# Altium PCB MYBOARD.PcbDoc (part 1 of 2)
Units mil, origin at the board's own origin, x right, y up, seen from the top; angles counter-clockwise.
Board outline 4724.41 x 3940 mil, 2 copper layers (Top Layer, Bottom Layer); 166 components, 173 nets, 742 pads, 144 vias.
Unrouted connection lines stored in the file: 194.
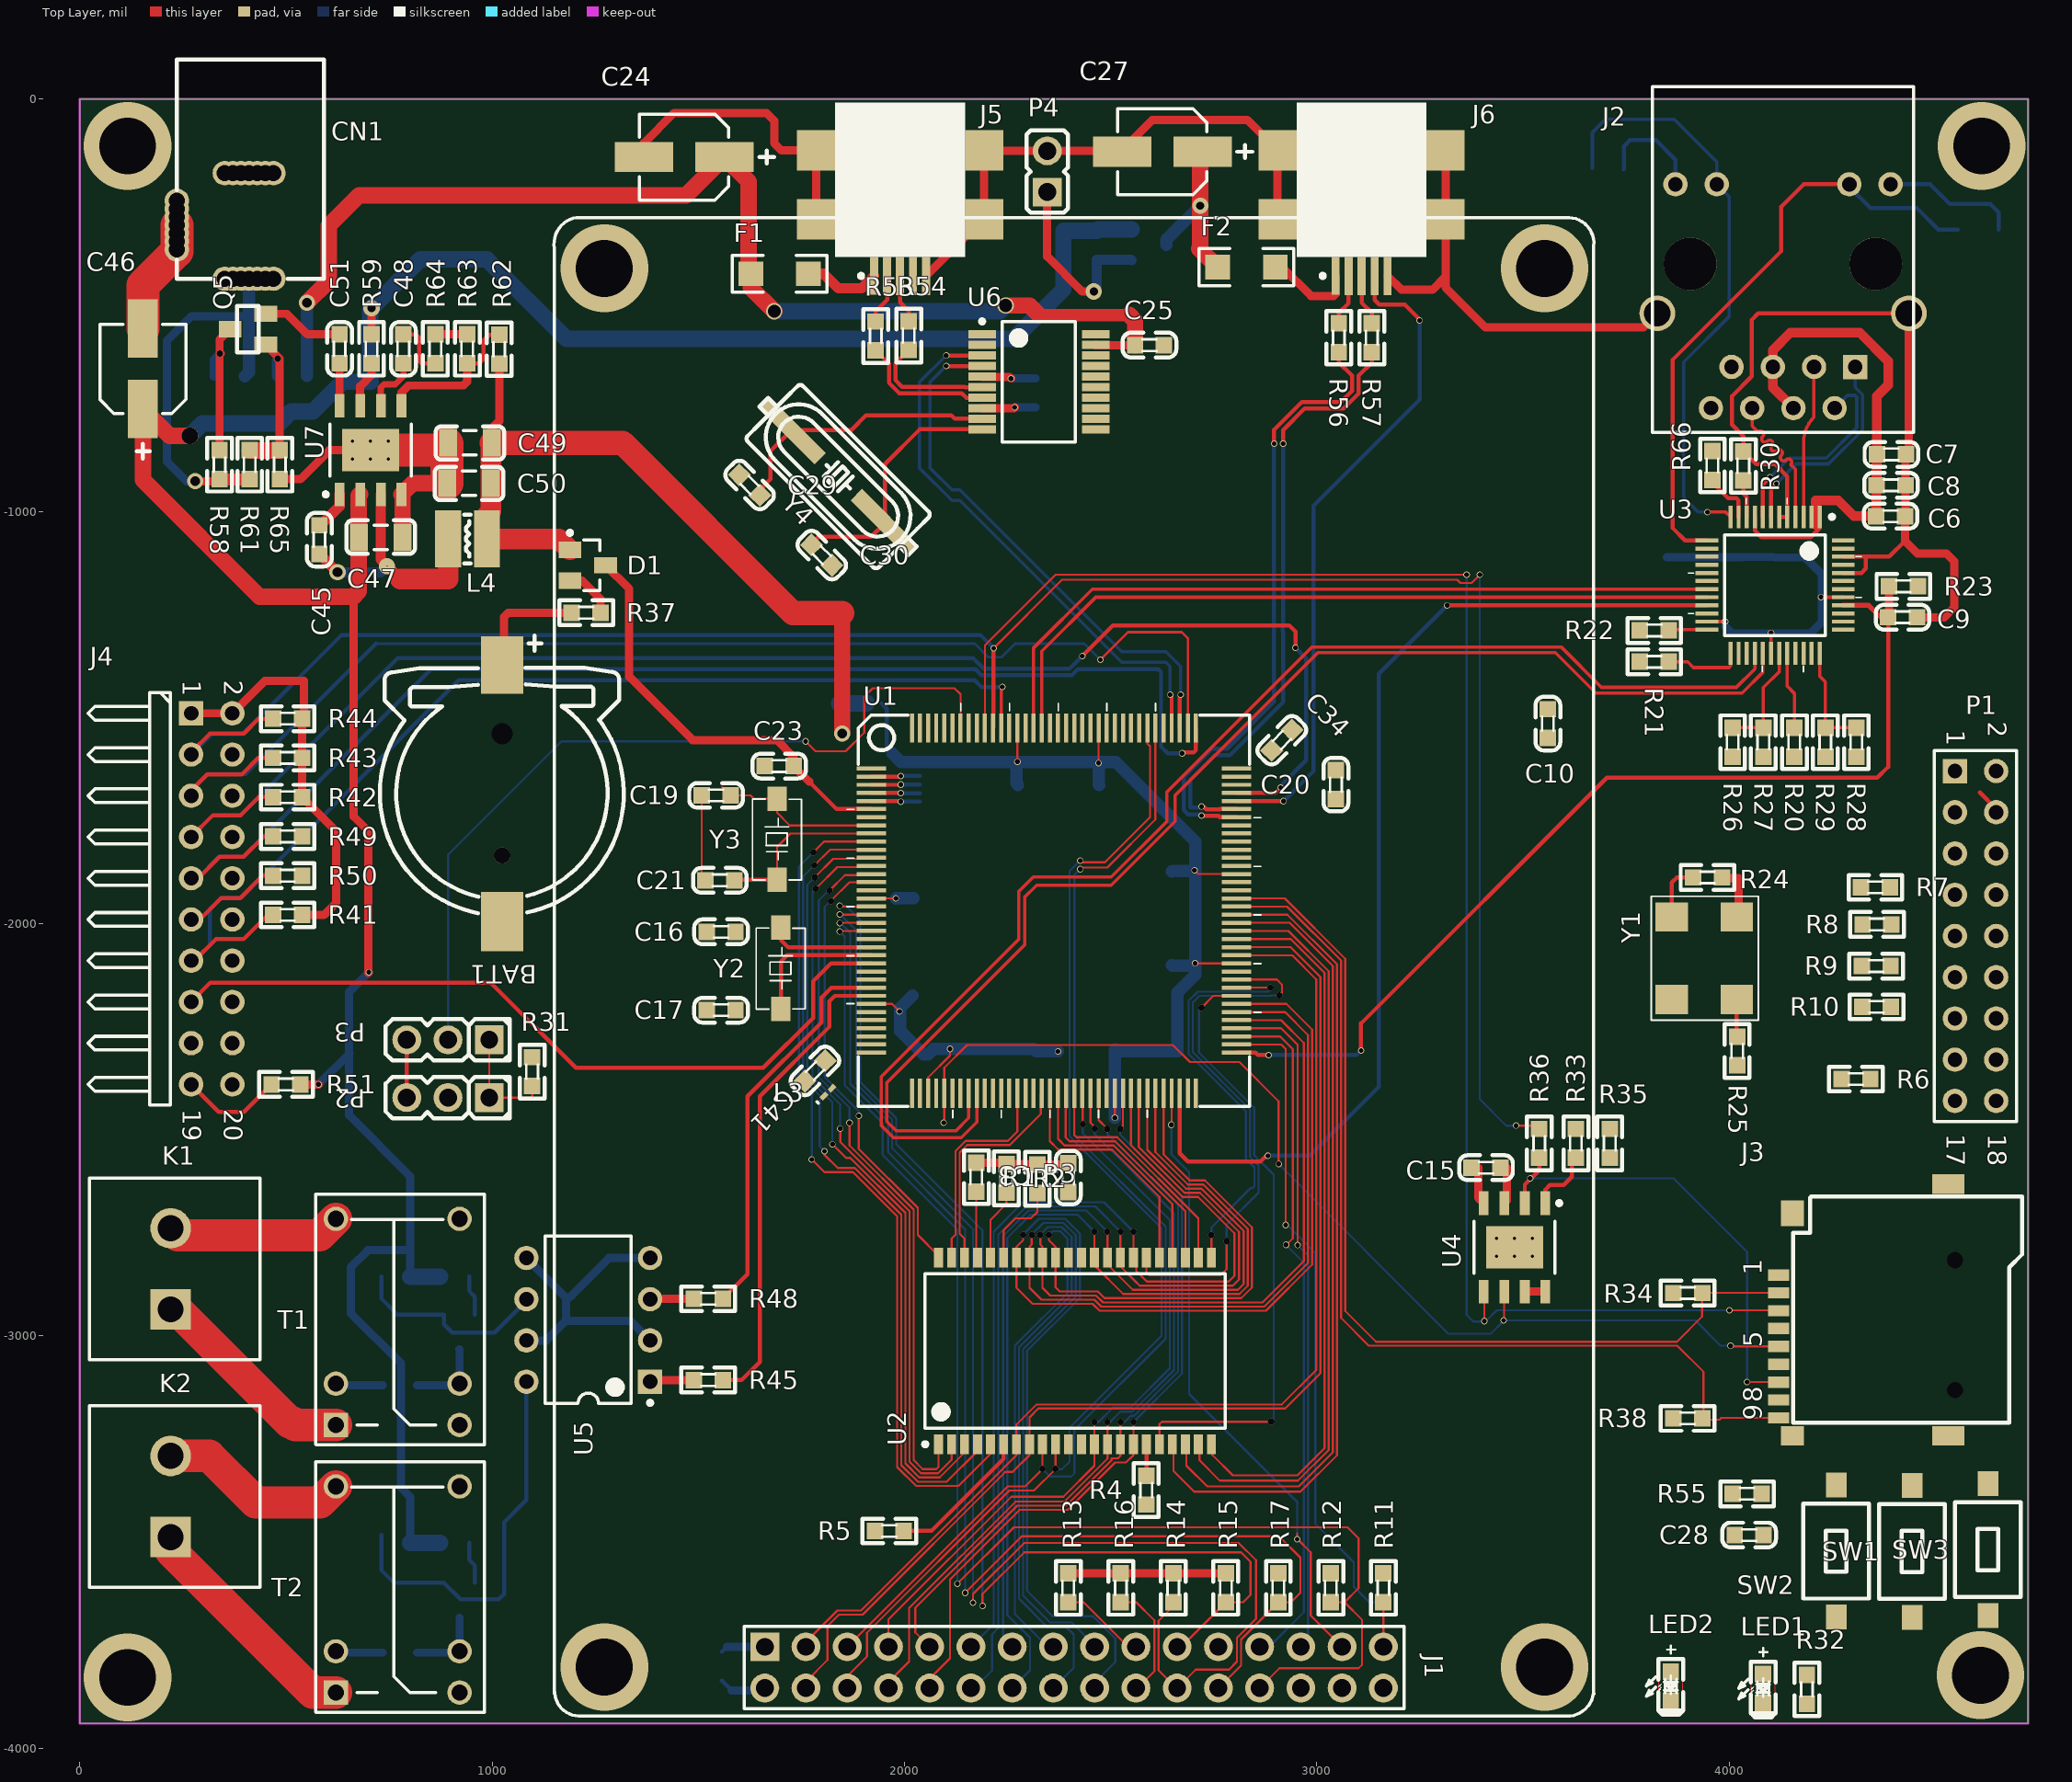
[diagram p0: Top Layer view]
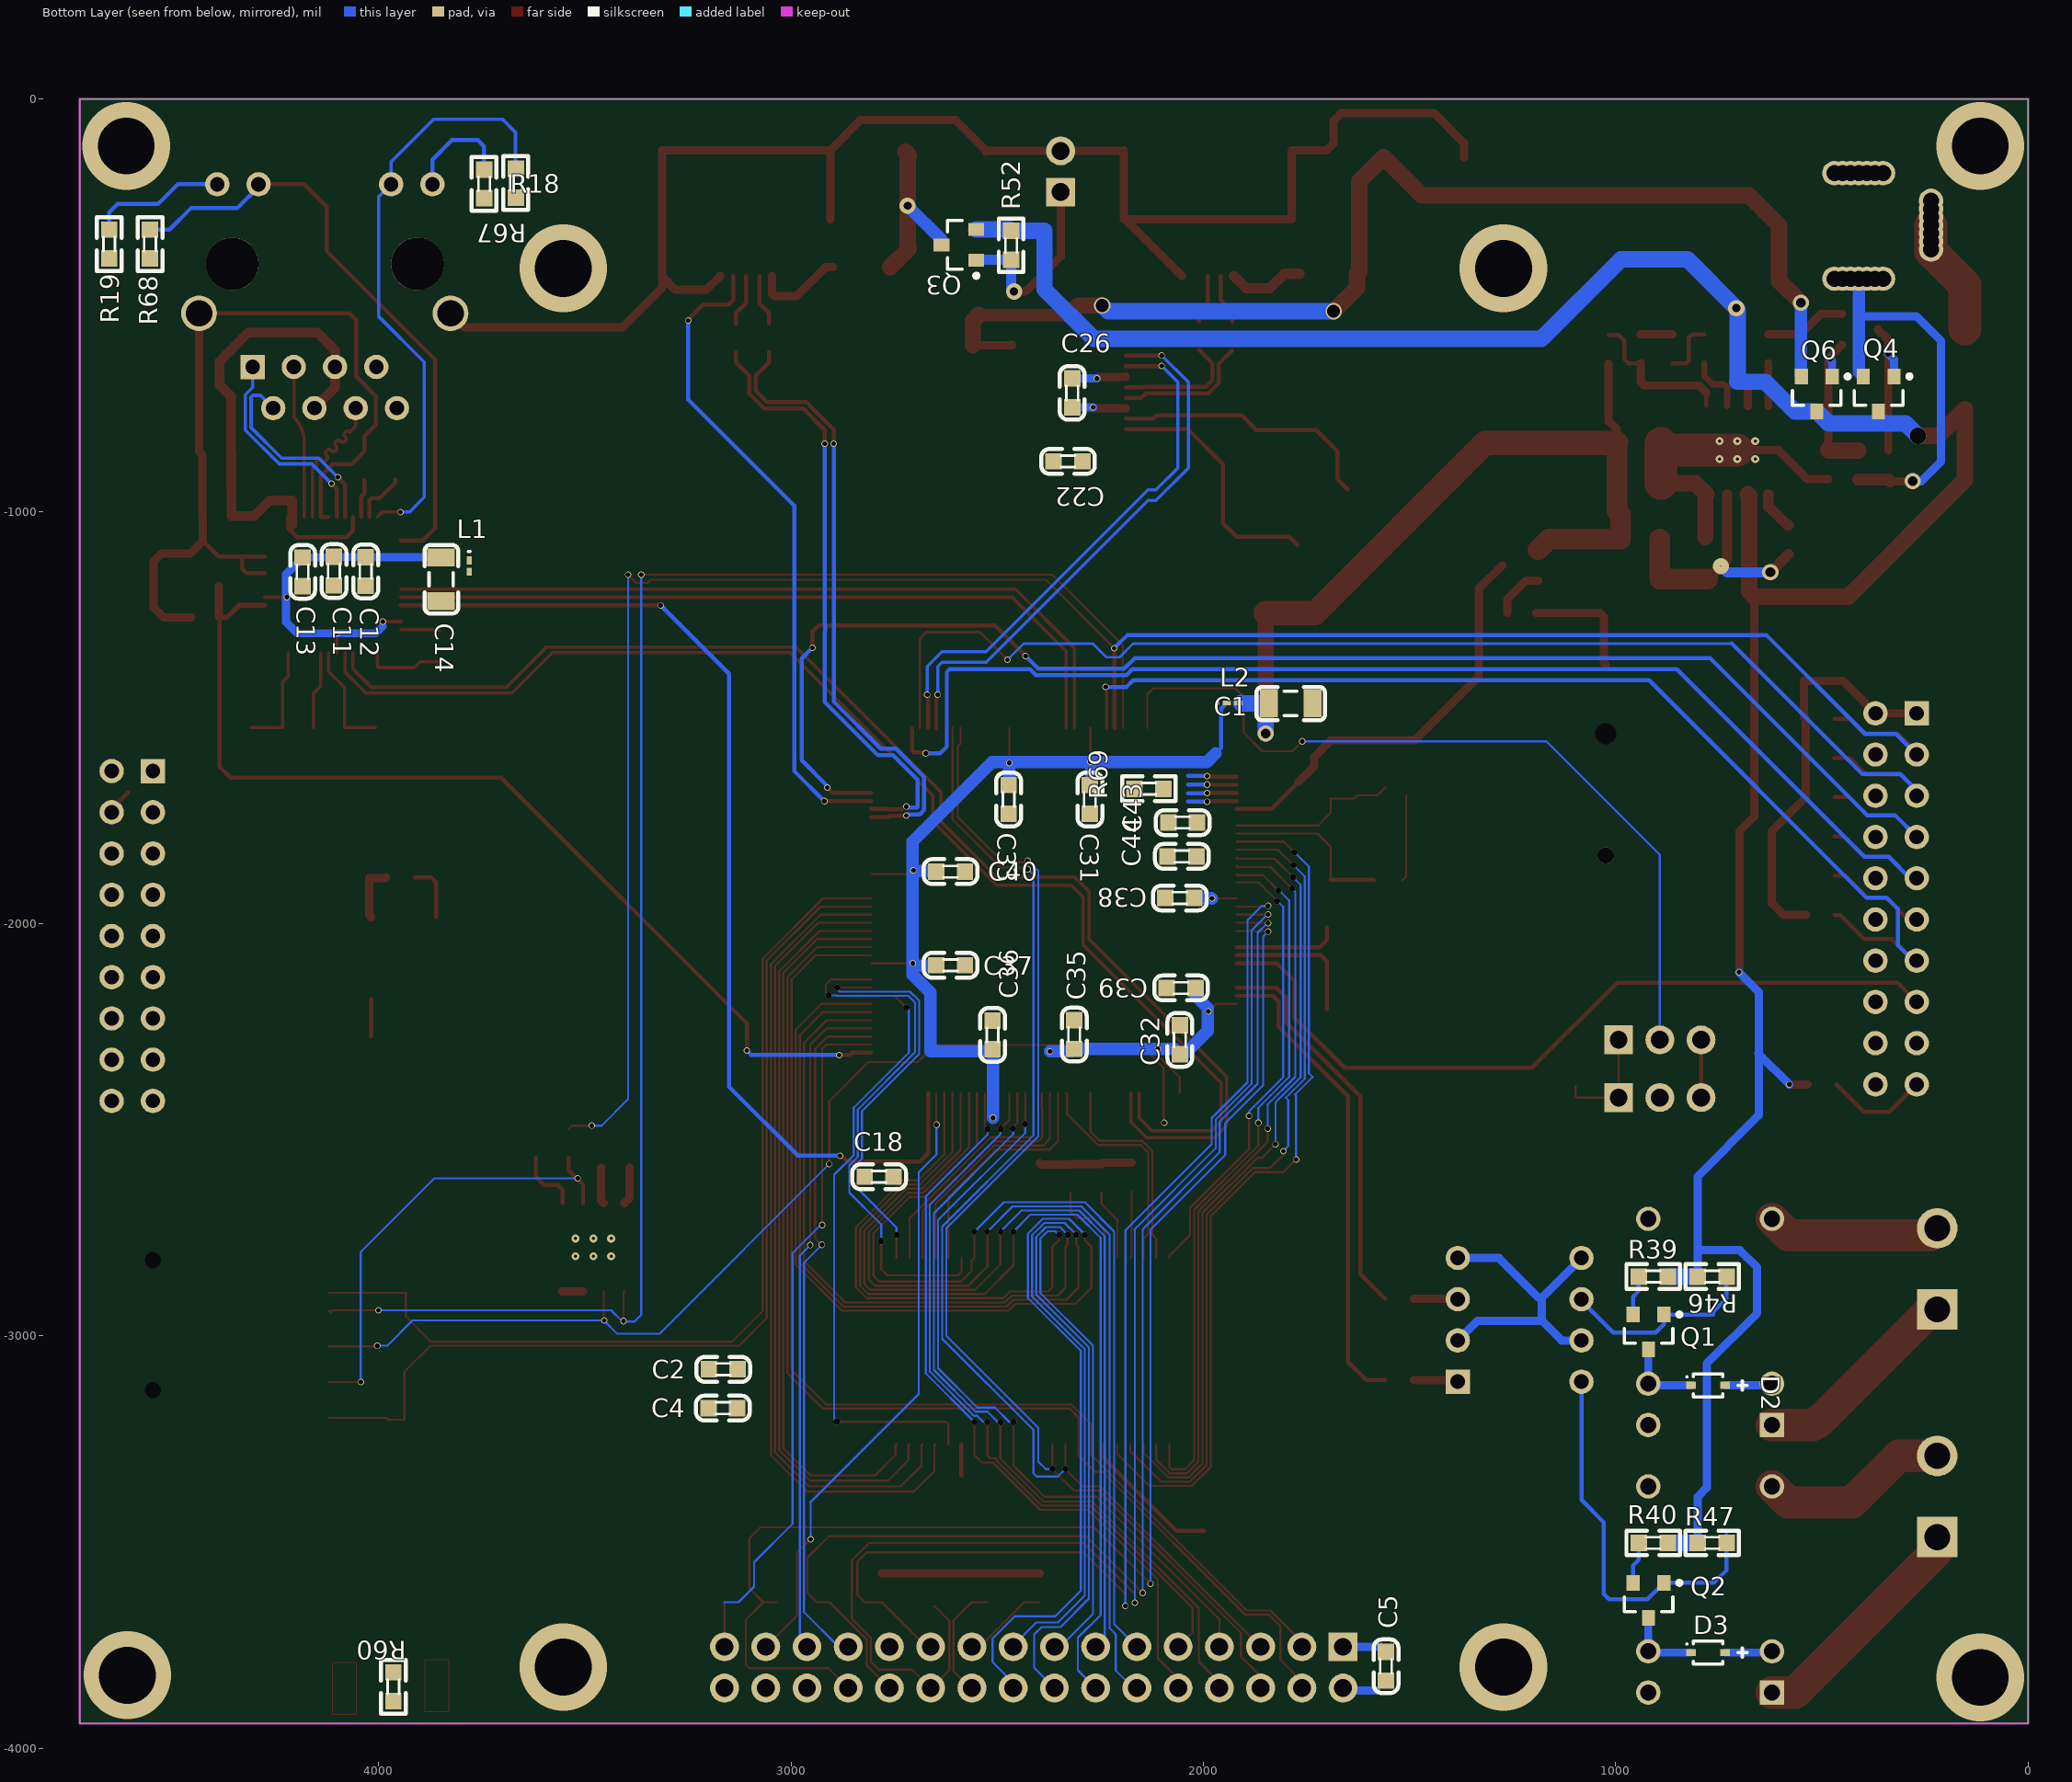
[diagram p1: Bottom Layer view, seen from below]

## Layer stack, top to bottom
Top Solder: solder mask 0.4, Solder Resist, Dk 3.5
Top Layer: signal copper 1.4
Dielectric 1: dielectric 12.6, FR-4, Dk 4.8
Bottom Layer: signal copper 1.4
Bottom Solder: solder mask 0.4, Solder Resist, Dk 3.5

## Board outline
0,-3940 0,0 4724.41,0 4724.41,-3940

## Design rules (kind name [scope] priority, off if disabled: settings)
Clearance [All] p1: gap=5 ignorepadtopadclearanceinfootprint=FALSE
DiffPairsRouting [All] p1: maxlimit=10 minlimit=10 mostfreqgap=6 toplayer_minwidth=6 toplayer_maxwidth=10 toplayer_prefwidth=6 bottomlayer_minwidth=6 bottomlayer_maxwidth=10 bottomlayer_prefwidth=6 maxuncoupledlength=500
PolygonConnect [All] p1: connectstyle=Relief reliefconductorwidth=10 reliefentries=4 polygonreliefangle="90 Angle" airgapwidth=10
RoutingVias [InDrillLayerPair('Top Layer - Bottom Layer')] p1: holewidth=11.81 width=15.75 viastyle="Through Hole" minholewidth=11.81 minwidth=15.75 maxholewidth=39.37 maxwidth=59.06
SolderMaskExpansion [All] p1: expansion=4
Width [All] p1: maxlimit=80 minlimit=5 preferedwidth=5
29 further rules are at their usual default settings.

## Classes and differential pairs
component class MYBOARD_03-CORE&SRAM: C1 C2 C3 C4 C5 C6 C7 C8 C9 C10 C11 C12 C13 C14 J1 J2 L1 P1 R1 R2 R3 R4 R5 R6 R7 R8 R9 R10 R11 R12 R13 R14 R15 R16 R17 R18 R19 R20 R21 R22 R23 R24 R25 R26 R27 R28 R29 R30 R66 R67 R68 U2 U3 Y1
component class "MYBOARD_04-Other Function": BAT1 C15 C16 C17 C18 C19 C20 C21 C22 C23 C24 C25 C26 C27 C28 C29 C30 D1 D2 D3 F1 F2 J3 J4 J5 J6 K1 K2 LED1 P2 P3 P4 Q1 Q2 Q3 R31 R32 R33 R34 R35 R36 R37 R38 R39 R40 R41 R42 R43 R44 R45 R46 R47 R48 R49 R50 R51 R52 R53 R54 R55 R56 R57 SW1 SW2 SW3 T1 T2 U1 U4 U5 U6 Y2 Y3 Y4
component class MYBOARD_05-PWR: C31 C32 C33 C34 C35 C36 C37 C38 C39 C40 C41 C43 C44 C45 C46 C47 C48 C49 C50 C51 CN1 L2 L3 L4 LED2 Q4 Q5 Q6 R58 R59 R60 R61 R62 R63 R64 R65 R69 U7
net class DATA[0..15]: DATA0 DATA1 DATA2 DATA3 DATA4 DATA5 DATA6 DATA7 DATA8 DATA9 DATA10 DATA11 DATA12 DATA13 DATA14 DATA15

## Components (designator, comment, footprint, x,y, rotation, side; value= is the part's Value field where it differs from the comment)
BAT1 "BATT" BC501SM 1024,-1995.05 r90 top locked
C1 "22uF" C1206 1788.15,-1466 r0 bottom
C2 "10uF" C0603_DWS 3164,-3081 r0 bottom
C3 "0.1uF" C0603_DWS 2397,-2616 r270 top
C4 "0.1uF" C0603_DWS 3165,-3175 r0 bottom
C5 "10uF" C0603_DWS 1557,-3801 r270 bottom
C6 "0.1uF" C0603_DWS 4391,-1012 r0 top
C7 "0.1uF" C0603_DWS 4393,-862 r0 top
C8 "0.1uF" C0603_DWS 4392,-937 r0 top
C9 "0.1uF" C0603_DWS 4420,-1257 r0 top
C10 "0.1uF" C0603_DWS 3560,-1515 r270 top
C11 "0.1uF" C0603_DWS 4108,-1145 r270 bottom
C12 "0.1uF" C0603_DWS 4031,-1146 r270 bottom
C13 "0.1uF" C0603_DWS 4184,-1147 r270 bottom
C14 "22uF" C1206 3848,-1164.85 r270 bottom
C15 "0.1uF" C0603_DWS 3410,-2592 r180 top
C16 "10pF" C0603_DWS 1555,-2020 r0 top
C17 "10pF" C0603_DWS 1555,-2210 r0 top
C18 "0.1uF" C0603_DWS 2786,-2614 r180 bottom
C19 "10pF" C0603_DWS 1543,-1689 r0 top
C20 "0.1uF" C0603_DWS 3046,-1663 r270 top
C21 "10pF" C0603_DWS 1552,-1895 r0 top
C22 "0.1uF" C0603_DWS 2328,-879 r0 bottom
C23 "1uF" C0603_DWS 1696,-1618 r180 top
C24 "22uF/25V" CAPAE7053X56M 1465.56,-141 r180 top
C25 "10uF" C0603_DWS 2594,-597 r0 top
C26 "0.1uF" C0603_DWS 2318,-713 r270 bottom
C27 "10uF/25" CAPAE7053X56M 2625,-128 r180 top
C28 "0.1uF" C0603_DWS 4048,-3483 r180 top
C29 "10pF" C0603_DWS 1624.25,-936.25 r315 top
C30 "10pF" C0603_DWS 1799.25,-1106.25 r135 top
C31 "0.1uF" C0603_DWS 2275,-1699 r270 bottom
C32 "0.1uF" C0603_DWS 2057,-2282 r90 bottom
C33 "0.1uF" C0603_DWS 2472,-1699 r270 bottom
C34 "0.1uF" C0603_DWS 2914.75,-1555.25 r45 top
C35 "0.1uF" C0603_DWS 2313,-2269 r90 bottom
C36 "0.1uF" C0603_DWS 2511,-2270 r90 bottom
C37 "0.1uF" C0603_DWS 2613,-2101 r180 bottom
C38 "0.1uF" C0603_DWS 2057,-1938 r0 bottom
C39 "10uF" C0603_DWS 2054,-2156 r0 bottom
C40 "10uF" C0603_DWS 2613,-1874 r180 bottom
C41 "0.1uF" C0603_DWS 1782.75,-2357.25 r225 top
C43 "10nF" C0603_DWS 2050,-1755 r0 bottom
C44 "1uF" C0603_DWS 2052,-1837 r0 bottom
C45 "10nF" C0603_DWS 581,-1069 r270 top
C46 "10uF/25" CAPAE7053X56M 153,-654.44 r90 top
C47 "10uF" C1206 729.85,-1063 r0 top
C48 "3.9nF" C0603_DWS 784.8,-606 r90 top
C49 "22uF" C1206 945.85,-834 r180 top
C50 "22uF" C1206 943.85,-932 r180 top
C51 "0.1uF" C0603_DWS 630,-606 r90 top
CN1 "DC005" PWR_JACK_UNI_MILLING 223.62,-435.91 r270 top
D1 "BAT54C" BAT54C 1231.69,-1131 r0 top
D2 "IN4148" 1N4148WS 776,-3120 r180 bottom
D3 "IN4148" 1N4148WS 776,-3768 r180 bottom
F1 "FUS" 1206 1697,-424 r180 top
F2 "FUS" 1206 2829,-408 r180 top
J1 "TFT_LCD" "TFT LCD" 1152,-3924 r90 top locked
J2 "HR911105A" HR911105A 3813.24,30.01 r0 top locked
J3 "TF-01A" TF-01A 4119.58,-3198.69 r90 top
J4 "Header 10X2" HDR2X10H 270,-1490 r270 top locked
J5 "MINI-USB-AB" MINI-B 1989,-277 r90 top
J6 "MINI-USB-AB" MINI-B 3108.26,-277 r90 top
K1 "KF128-2P" KF128-2P 437,-2616.95 r270 top locked
K2 "KF128-2P" KF128-2P 437,-3169 r270 top locked
L1 "Inductor" 0603 3780,-1132.78 r270 bottom value=10mH
L2 "Inductor" 0603 1929.22,-1465 r180 bottom value=10mH
L3 "Inductor" 0603 1814.26,-2408.74 r45 top value=10mH
L4 "Inductor" CD32 940.24,-1067 r90 top value="10uH 4A"
LED1 "LED" LED-0603 4082,-3855 r90 top
LED2 "LED" LED-0603 3858,-3849 r90 top
P1 "Header 9X2" HDR2X9 4547,-1630 r270 top
P2 "MHDR1X3" HN1X3 843,-2422 r180 top
P3 "MHDR1X3" HN1X3 843,-2282 r180 top
P4 "MHDR1X2" JP1 2346,-176 r0 top
Q1 "IRLML6402" SOTFL95P264X112-3N 920.4,-2990.32 r270 bottom
Q2 "IRLML6402" SOTFL95P264X112-3N 920.4,-3641.32 r270 bottom
Q3 "IRLML6402" SOTFL95P264X112-3N 2592.68,-354 r0 bottom
Q4 "IRLML6402" SOTFL95P264X112-3N 362.6,-715.32 r270 bottom
Q5 "2N7002K-T1" SOT23 407.69,-558.4 r90 top
Q6 "IRLML6402" SOTFL95P264X112-3N 512.4,-715.32 r270 bottom
R1 "Res3" R0603_5MIL_DWS 2174,-2615 r90 top value=1K
R2 "Res3" R0603_5MIL_DWS 2247,-2618 r90 top value=1K
R3 "Res3" R0603_5MIL_DWS 2322,-2619 r90 top value=1K
R4 "Res3" R0603_5MIL_DWS 2586,-3374 r270 top value=1K
R5 "Res3" R0603_5MIL_DWS 1963,-3473 r180 top value=1K
R6 "Res3" R0603_5MIL_DWS 4307,-2377 r0 top value="4.7K 1%"
R7 "Res3" R0603_5MIL_DWS 4354,-1912 r0 top value="4.7K 1%"
R8 "Res3" R0603_5MIL_DWS 4358,-2002 r180 top value=1K
R9 "Res3" R0603_5MIL_DWS 4356,-2103 r0 top value=1K/DNP
R10 "Res3" R0603_5MIL_DWS 4357,-2202 r0 top value=1K
R11 "Res3" R0603_5MIL_DWS 3161,-3611 r90 top value=4.7K
R12 "Res3" R0603_5MIL_DWS 3033.67,-3611 r90 top value=4.7K
R13 "Res3" R0603_5MIL_DWS 2397,-3611 r90 top value=4.7K
R14 "Res3" R0603_5MIL_DWS 2651.67,-3611 r90 top value=4.7K
R15 "Res3" R0603_5MIL_DWS 2779,-3611 r90 top value=4.7K
R16 "Res3" R0603_5MIL_DWS 2524.33,-3611 r90 top value=4.7K
R17 "Res3" R0603_5MIL_DWS 2906.33,-3611 r270 top value=10K
R18 "Res3" R0603_5MIL_DWS 3744,-206 r90 bottom value=1K
R19 "Res3" R0603_5MIL_DWS 4653,-352 r90 bottom value=1K
R20 "Res3" R0603_5MIL_DWS 4157.6,-1560 r90 top value=2.2K
R21 "Res3" R0603_5MIL_DWS 3818,-1365 r0 top value=1K
R22 "Res3" R0603_5MIL_DWS 3818,-1289 r0 top value=1K
R23 "Res3" R0603_5MIL_DWS 4422,-1182 r180 top value=0R/DNP
R24 "Res3" R0603_5MIL_DWS 3947,-1888 r0 top value=1K
R25 "Res3" R0603_5MIL_DWS 4019,-2309 r270 top value=33R
R26 "Res3" R0603_5MIL_DWS 4008,-1560 r90 top value=1K
R27 "Res3" R0603_5MIL_DWS 4082.4,-1560 r270 top value=1K/DNP
R28 "Res3" R0603_5MIL_DWS 4308,-1560 r270 top value=1K
R29 "Res3" R0603_5MIL_DWS 4232.8,-1560 r90 top value=1K/DNP
R30 "Res3" R0603_5MIL_DWS 4034,-890 r270 top value=1K
R31 "Res3" R0603_5MIL_DWS 1097,-2359 r90 top value=10K
R32 "Res3" R0603_5MIL_DWS 4188,-3857 r270 top value=1K
R33 "Res3" R0603_5MIL_DWS 3628,-2533 r270 top value=10K
R34 "Res3" R0603_5MIL_DWS 3899,-2896 r0 top value=10K
R35 "Res3" R0603_5MIL_DWS 3710,-2533 r90 top value=10K
R36 "Res3" R0603_5MIL_DWS 3539,-2533 r90 top value=0R
R37 "Res3" R0603_5MIL_DWS 1228,-1246 r180 top value=1K
R38 "Res3" R0603_5MIL_DWS 3899,-3200 r180 top value=10K
R39 "Res3" R0603_5MIL_DWS 909,-2856 r0 bottom value=10
R40 "Res3" R0603_5MIL_DWS 909,-3502 r0 bottom value=10
R41 "Res3" R0603_5MIL_DWS 504,-1979 r0 top value=10K
R42 "Res3" R0603_5MIL_DWS 504,-1693.4 r0 top value=10K
R43 "Res3" R0603_5MIL_DWS 504,-1598.2 r0 top value=10K
R44 "Res3" R0603_5MIL_DWS 504,-1503 r0 top value=10K
R45 "Res3" R0603_5MIL_DWS 1524,-3107 r0 top value=330
R46 "Res3" R0603_5MIL_DWS 766,-2856 r180 bottom value=10K
R47 "Res3" R0603_5MIL_DWS 766,-3502 r180 bottom value=10K
R48 "Res3" R0603_5MIL_DWS 1524,-2910 r0 top value=330
R49 "Res3" R0603_5MIL_DWS 504,-1788.6 r180 top value=10K
R50 "Res3" R0603_5MIL_DWS 504,-1883.8 r180 top value=10K
R51 "Res3" R0603_5MIL_DWS 500,-2390 r180 top value=0R
R52 "Res3" R0603_5MIL_DWS 2466,-355 r90 bottom value=10K
R53 "Res3" R0603_5MIL_DWS 1930,-575 r90 top value=10
R54 "Res3" R0603_5MIL_DWS 2010,-574 r90 top value=10
R55 "Res3" R0603_5MIL_DWS 4043,-3383 r180 top value=10K
R56 "Res3" R0603_5MIL_DWS 3053,-579 r90 top value=10
R57 "Res3" R0603_5MIL_DWS 3133,-579 r90 top value=10
R58 "Res3" R0603_5MIL_DWS 339,-887 r90 top value=10K
R59 "Res3" R0603_5MIL_DWS 707.4,-606 r90 top value=10K
R60 "Res3" R0603_5MIL_DWS 3964,-3851 r270 bottom value=1K
R61 "Res3" R0603_5MIL_DWS 412,-887 r90 top value=1K
R62 "Res3" R0603_5MIL_DWS 1017,-607 r90 top value=26.1K
R63 "Res3" R0603_5MIL_DWS 939.6,-606 r90 top value=10K
R64 "Res3" R0603_5MIL_DWS 862.2,-606 r90 top value=6.8k
R65 "Res3" R0603_5MIL_DWS 485,-887 r270 top value=10K
R66 "Res3" R0603_5MIL_DWS 3959,-889 r270 top value=1K
R67 "Res3" R0603_5MIL_DWS 3667,-204 r90 bottom value=1K
R68 "Res3" R0603_5MIL_DWS 4554,-352 r90 bottom value=1K
R69 "Res3" R0603_5MIL_DWS 2132,-1673 r0 bottom value=0R
SW1 "reset" SW-TAKT_6X3.5_SMD 4443,-3523 r180 top
SW2 "reset" SW-TAKT_6X3.5_SMD 4259,-3522 r0 top
SW3 "reset" SW-TAKT_6X3.5_SMD 4627,-3518 r0 top
T1 "HK4100F-DC5V-SHG" HK4100F 621,-3216 r90 top locked
T2 "HK4100F-DC5V-SHG" HK4100F 621,-3865 r90 top locked
U1 "STM32F407ZET6" LQFP144 2362.2,-1968.5 r0 top locked
U2 "IS62WV51216BLL-55TLI" TSOP80P1180X120-44N 2413.23,-3036.38 r90 top locked
U3 "DM9161AEP" LQFP-48 4111,-1179 r270 top locked
U4 "W25Q64CVSSIG" SOIC-8 3479,-2785.28 r270 top
U5 "TLP521-2" DIP-8 1233,-2961 r180 top
U6 "CH340T" SSOP-20 2325.8,-686.16 r0 top
U7 "MP2307DN" SOIC-8 705,-851.72 r90 top
Y1 "XO21-YACTC-50MHz" XO75 3860.52,-1984 r270 top
Y2 "8MHz" "CRYSTAL22.1184_3*5 - DUPLICATE" 1700,-2206.85 r90 top
Y3 "32.768KHz" "CRYSTAL22.1184_3*5 - DUPLICATE" 1691,-1893.85 r90 top
Y4 "12MHz" HC49/SMD2_THIN 1839,-916 r135 top

## Footprints (in the part's own frame and the unit in brackets; to place one, negate y for a bottom-side part, rotate by r counter-clockwise, add the part's x,y. Pads: shape width x height; smd on the part's side, far side on the other; paste and mask are expansions set on the pad)
1N4148WS [mm] "SODFL, 2-Leads, Body 1.30x2.50mm, IPC Medium Density"
  rect 0.59x0.45 smd: 1(-1.055,0) 2(1.055,0)
  silkscreen extent -1.35,-0.7 2.41,0.7, body extent -0.9,-0.7 0.9,0.7, height 1.1
0603 [mm] "Chip Inductor, Body 0.6x0.3mm, IPC High Density"
  rect 0.5x0.3 smd: 1(-0.35,0) 2(0.35,0)
  silkscreen extent -0.9,-0.05 -0.9,0.05, body extent -0.33,-0.18 0.33,0.18, height 0.55
1206 [mil]
  rect 60x60 smd: 1(-70,0) 2(70,0)
  silkscreen extent -115,-45 115,45, body extent -75,-35 75,35, height 39
BAT54C [mm] "SOTFL, 3-Leads, Body 2.97x2.55mm, Pitch 0.95mm, IPC Medium Density"
  rect 1.4x1 smd: 1(-1.1,0.95) 2(-1.1,-0.95) 3(1.1,0)
  silkscreen extent -1.22,-1.55 0.75,2.12, body extent -0.75,-1.57 0.75,1.57, height 1.2
BC501SM [mm] "CR1220,3V"
  rect 3.54x2.6 smd: 1(15.8,0)
  rect 3.66x2.6 smd: 2(0,0)
  silkscreen extent 0.52,-7.5 17.6,7.52
C0603_DWS [mil]
  rect 40x40 smd: 1(-35,0) 2(35,0)
  silkscreen extent -65,-30 65,30
C1206 [mm] "Chip Capacitor, Body 3.2x1.6mm, IPC High Density"
  rect 1.1x1.7 smd: 1(-1.35,0) 2(1.35,0)
  silkscreen extent -2.11,-1.02 2.11,1.04, body extent -1.7,-0.9 1.7,0.9, height 1.3
CAPAE7053X56M [mm] "Aluminum Electrolytic Capacitor, Body 5.40x5.30x5.60mm, IPC Low Density"
  rect 3.6x1.85 smd: 1(-2.475,0) 2(2.475,0)
  silkscreen extent -5.54,-2.65 2.75,2.65, body extent -2.75,-2.75 2.75,2.75, height 5.6
CD32 [mm]
  rect 3.5x1.6 smd: 1(0,1.2) 2(0,-1.2)
  silkscreen extent -1.5,-0.2 1.5,0.2
"CRYSTAL22.1184_3*5 - DUPLICATE" [mm]
  rect 1.5x1.2 smd: 1(0,0) 2(5,0)
  silkscreen extent -0.02,-1.5 4.98,1.51
DIP-8 [mm] "DIP; 8 Leads; Row Spacing 7.62 mm; Pitch 2.54 mm"
  rect 1.5x1.5 hole 0.9: 1(-3.81,3.81)
  round 1.5 hole 0.9: 2(-3.81,1.27) 3(-3.81,-1.27) 4(-3.81,-3.81) 5(3.81,-3.81) 6(3.81,-1.27) 7(3.81,1.27) 8(3.81,3.81)
  silkscreen extent -3.94,-5.15 2.65,5.23, body extent -3.6,-5.15 3.6,5.15, height 5.08
HC49/SMD2_THIN [mm]
  rect 5x1 smd: 1(-4.064,0) 2(4.064,0)
  silkscreen extent -6.48,-2.41 6.48,2.41
HDR2X9 [mm] "Connector; Header; 9x2 Position"
  rect 1.5x1.5 hole 0.9: 1(0,0)
  round 1.5 hole 0.9: 2(0,2.54) 3(2.54,0) 4(2.54,2.54) 5(5.08,0) 6(5.08,2.54) 7(7.62,0) 8(7.62,2.54) 9(10.16,0) 10(10.16,2.54) 11(12.7,0) 12(12.7,2.54) 13(15.24,0) 14(15.24,2.54) 15(17.78,0) 16(17.78,2.54) 17(20.32,0) 18(20.32,2.54)
  silkscreen extent -1.27,-1.27 21.59,3.81
HDR2X10H [mm] "Connector; Header; 10x2 Position; Right Angle"
  rect 1.5x1.5 hole 0.9: 1(0,0)
  round 1.5 hole 0.9: 2(0,2.54) 3(2.54,0) 4(2.54,2.54) 5(5.08,0) 6(5.08,2.54) 7(7.62,0) 8(7.62,2.54) 9(10.16,0) 10(10.16,2.54) 11(12.7,0) 12(12.7,2.54) 13(15.24,0) 14(15.24,2.54) 15(17.78,0) 16(17.78,2.54) 17(20.32,0) 18(20.32,2.54) 19(22.86,0) 20(22.86,2.54)
  silkscreen extent -1.27,-6.35 24.13,-1.27
HK4100F [mm]
  rect 1.5x1.5 hole 1: 1(0,0)
  round 1.5 hole 1: 2(2.54,0) 3(12.7,0) 4(12.7,-7.62) 5(2.54,-7.62) 6(0,-7.62)
  silkscreen extent -1.23,-9.14 14.22,1.25
HN1X3 [mil]
  rect 70x70 hole 43.31: 1(-150,0)
  round 70 hole 43.31: 2(-50,0) 3(50,0)
  silkscreen extent -200,-50 101,50
HR911105A [mm] "10/100Base-TX ,8-Pin,G/Y LED,"
  rect 1.5x1.5 hole 0.89: 1(12.5,-17.27)
  round 1.5 hole 0.89: 2(11.23,-19.81) 3(9.96,-17.27) 4(8.69,-19.81) 5(7.42,-17.27) 6(6.15,-19.81) 7(4.88,-17.27) 8(3.61,-19.81) 9(14.675,-6.02) 10(12.135,-6.02) 11(3.965,-6.02) 12(1.425,-6.02)
  round 2.2 hole 1.63: 13(0.305,-13.97) 14(15.795,-13.97)
  round 3.25 hole 3.25: 15(2.335,-10.92) 16(13.765,-10.92)
  silkscreen extent 0,-21.3 16.1,0
JP1 [mil]
  rect 70x70 hole 43.31: 1(0,-50)
  round 70 hole 43.31: 2(0,50)
  silkscreen extent -50,-100 50,100
KF128-2P [mm] "Leyconn 2pin 71540XNN5800"
  rect 2.5x2.5 hole 1.6: 1(8.1,-5.5)
  round 2.5 hole 1.6: 2(3.1,-5.5)
  silkscreen extent 0,-10.5 11.2,0
LED-0603 [mil]
  rect 40x40 smd: A(35,0) C(-35,0)
  Top Layer lines w2: -62.99,28.7 -62.99,-28.7 62.99,-28.7 62.99,28.7 -62.99,28.7
  silkscreen extent -70,-30 98,59
LQFP144 [mm]
  rect 1.8x0.254 smd: 1(-11.25,8.75) 2(-11.25,8.25) 3(-11.25,7.75) 4(-11.25,7.25) 5(-11.25,6.75) 6(-11.25,6.25) 7(-11.25,5.75) 8(-11.25,5.25) 9(-11.25,4.75) 10(-11.25,4.25) 11(-11.25,3.75) 12(-11.25,3.25) 13(-11.25,2.75) 14(-11.25,2.25) 15(-11.25,1.75) 16(-11.25,1.25) 17(-11.25,0.75) 18(-11.25,0.25) 19(-11.25,-0.25) 20(-11.25,-0.75) 21(-11.25,-1.25) 22(-11.25,-1.75) 23(-11.25,-2.25) 24(-11.25,-2.75) 25(-11.25,-3.25) 26(-11.25,-3.75) 27(-11.25,-4.25) 28(-11.25,-4.75) 29(-11.25,-5.25) 30(-11.25,-5.75) 31(-11.25,-6.25) 32(-11.25,-6.75) 33(-11.25,-7.25) 34(-11.25,-7.75) 35(-11.25,-8.25) 36(-11.25,-8.75) 73(11.25,-8.75) 74(11.25,-8.25) 75(11.25,-7.75) 76(11.25,-7.25) 77(11.25,-6.75) 78(11.25,-6.25) 79(11.25,-5.75) 80(11.25,-5.25) 81(11.25,-4.75) 82(11.25,-4.25) 83(11.25,-3.75) 84(11.25,-3.25) 85(11.25,-2.75) 86(11.25,-2.25) 87(11.25,-1.75) 88(11.25,-1.25) 89(11.25,-0.75) 90(11.25,-0.25) 91(11.25,0.25) 92(11.25,0.75) 93(11.25,1.25) 94(11.25,1.75) 95(11.25,2.25) 96(11.25,2.75) 97(11.25,3.25) 98(11.25,3.75) 99(11.25,4.25) 100(11.25,4.75) 101(11.25,5.25) 102(11.25,5.75) 103(11.25,6.25) 104(11.25,6.75) 105(11.25,7.25) 106(11.25,7.75) 107(11.25,8.25) 108(11.25,8.75)
  rect 0.254x1.8 smd: 37(-8.75,-11.25) 38(-8.25,-11.25) 39(-7.75,-11.25) 40(-7.25,-11.25) 41(-6.75,-11.25) 42(-6.25,-11.25) 43(-5.75,-11.25) 44(-5.25,-11.25) 45(-4.75,-11.25) 46(-4.25,-11.25) 47(-3.75,-11.25) 48(-3.25,-11.25) 49(-2.75,-11.25) 50(-2.25,-11.25) 51(-1.75,-11.25) 52(-1.25,-11.25) 53(-0.75,-11.25) 54(-0.25,-11.25) 55(0.25,-11.25) 56(0.75,-11.25) 57(1.25,-11.25) 58(1.75,-11.25) 59(2.25,-11.25) 60(2.75,-11.25) 61(3.25,-11.25) 62(3.75,-11.25) 63(4.25,-11.25) 64(4.75,-11.25) 65(5.25,-11.25) 66(5.75,-11.25) 67(6.25,-11.25) 68(6.75,-11.25) 69(7.25,-11.25) 70(7.75,-11.25) 71(8.25,-11.25) 72(8.75,-11.25) 109(8.75,11.25) 110(8.25,11.25) 111(7.75,11.25) 112(7.25,11.25) 113(6.75,11.25) 114(6.25,11.25) 115(5.75,11.25) 116(5.25,11.25) 117(4.75,11.25) 118(4.25,11.25) 119(3.75,11.25) 120(3.25,11.25) 121(2.75,11.25) 122(2.25,11.25) 123(1.75,11.25) 124(1.25,11.25) 125(0.75,11.25) 126(0.25,11.25) 127(-0.25,11.25) 128(-0.75,11.25) 129(-1.25,11.25) 130(-1.75,11.25) 131(-2.25,11.25) 132(-2.75,11.25) 133(-3.25,11.25) 134(-3.75,11.25) 135(-4.25,11.25) 136(-4.75,11.25) 137(-5.25,11.25) 138(-5.75,11.25) 139(-6.25,11.25) 140(-6.75,11.25) 141(-7.25,11.25) 142(-7.75,11.25) 143(-8.25,11.25) 144(-8.75,11.25)
  silkscreen extent -12.76,-12.76 12.76,12.76
LQFP-48 [mm] "TSQFP, 48-Leads, Body 7.00x7.00mm, Pitch 0.50mm, IPC Medium Density"
  rect 1.4x0.25 smd: 1(-4.2,2.75) 2(-4.2,2.25) 3(-4.2,1.75) 4(-4.2,1.25) 5(-4.2,0.75) 6(-4.2,0.25) 7(-4.2,-0.25) 8(-4.2,-0.75) 9(-4.2,-1.25) 10(-4.2,-1.75) 11(-4.2,-2.25) 12(-4.2,-2.75) 25(4.2,-2.75) 26(4.2,-2.25) 27(4.2,-1.75) 28(4.2,-1.25) 29(4.2,-0.75) 30(4.2,-0.25) 31(4.2,0.25) 32(4.2,0.75) 33(4.2,1.25) 34(4.2,1.75) 35(4.2,2.25) 36(4.2,2.75)
  rect 0.25x1.4 smd: 13(-2.75,-4.2) 14(-2.25,-4.2) 15(-1.75,-4.2) 16(-1.25,-4.2) 17(-0.75,-4.2) 18(-0.25,-4.2) 19(0.25,-4.2) 20(0.75,-4.2) 21(1.25,-4.2) 22(1.75,-4.2) 23(2.25,-4.2) 24(2.75,-4.2) 37(2.75,4.2) 38(2.25,4.2) 39(1.75,4.2) 40(1.25,4.2) 41(0.75,4.2) 42(0.25,4.2) 43(-0.25,4.2) 44(-0.75,4.2) 45(-1.25,4.2) 46(-1.75,4.2) 47(-2.25,4.2) 48(-2.75,4.2)
  silkscreen extent -5.33,-5.33 5.33,5.31, body extent -3.5,-3.5 3.5,3.5, height 1.6
MINI-B [mm] "Connector; USB Mini-B, Sinking Type, SM; 5 Position; Right Angle,481900001"
  rect 2.35x0.5 smd: 1(-3.862,1.6) 2(-3.862,0.8) 3(-3.862,0) 4(-3.862,-0.8) 5(-3.862,-1.6)
  rect 2.5x2.35 smd: MH1(-0.387,-5.175) MH2(3.863,-5.175) MH3(3.863,5.175) MH4(-0.387,5.175)
  silkscreen extent -3.99,-4 6.81,4, body extent -1.8,-3.84 6.8,3.86, height 0.35
PWR_JACK_UNI_MILLING [mm]
  round 1.5 hole 1: +(0,4.75) +1(0,5.25) +2(0,5.75) +3(0,6.25) +4(0,4.25) +5(0,3.75) +6(0,3.25) -(-6.5,4.75) -1(-6.5,5.25) -2(-6.5,5.75) -3(-6.5,4.25) -4(-6.5,3.75) -5(-6.5,6.25) -6(-6.5,3.25) --(-3.3,0.3) --1(-3.8,0.3) --2(-4.3,0.3) --3(-4.8,0.3) --4(-2.8,0.3) --5(-2.3,0.3) --6(-1.8,0.3)
  silkscreen extent -13.5,0.3 0,9.35
R0603_5MIL_DWS [mil]
  rect 40x40 smd: 1(-35,0) 2(35,0)
  silkscreen extent -65,-30 65,30
SOIC-8 [mm] "SOIC, 8-Leads, Body 4.90x3.90mm, Pitch 1.27mm, Thermal Pad 3.51x2.62mm, IPC Medium Density"
  rect 1.45x0.6 smd: 1(-2.725,1.905) 2(-2.725,0.635) 3(-2.725,-0.635) 4(-2.725,-1.905) 5(2.725,-1.905) 6(2.725,-0.635) 7(2.725,0.635) 8(2.725,1.905)
  rect 2.62x3.51 smd: 9(0,0)
  silkscreen extent -2.85,-2.5 1.6,2.88, body extent -2,-2.5 2,2.5, height 1.7
SOT23 [mm]
  rect 1x1.4 smd: 1(-0.95,-1.1) 2(0.95,-1.1) 3(0,1.1)
  silkscreen extent -1.42,-0.66 1.42,0.66
SOTFL95P264X112-3N [mm] "SOTFL, 3-Leads, Body 2.92x2.64mm, Pitch 0.95mm, IPC Medium Density"
  rect 0.972x0.8 smd: 1(-1.075,0.95) 2(-1.075,-0.95) 3(1.075,0)
  silkscreen extent -1.2,-1.5 0.7,2.02, body extent -0.7,-1.52 0.7,1.52, height 1.12
SSOP-20 [mm] "SOP, 20-Leads, Body 7.20x5.30mm, Pitch 0.65mm, IPC Medium Density"
  rect 1.7x0.5 smd: 1(-3.5,2.925) 2(-3.5,2.275) 3(-3.5,1.625) 4(-3.5,0.975) 5(-3.5,0.325) 6(-3.5,-0.325) 7(-3.5,-0.975) 8(-3.5,-1.625) 9(-3.5,-2.275) 10(-3.5,-2.925) 11(3.5,-2.925) 12(3.5,-2.275) 13(3.5,-1.625) 14(3.5,-0.975) 15(3.5,-0.325) 16(3.5,0.325) 17(3.5,0.975) 18(3.5,1.625) 19(3.5,2.275) 20(3.5,2.925)
  silkscreen extent -3.62,-3.7 2.25,3.85, body extent -2.65,-3.7 2.65,3.7, height 1.73
SW-TAKT_6X3.5_SMD [mil]
  rect 50x60 smd: P$1(0,160) P$2(0,-160)
  silkscreen extent -80,-115 80,115
TF-01A [mm] "TF CARD SOCKET"
  rect 0.7x1.3 smd: 1(8.8,0) 2(7.7,0) 3(6.6,0) 4(5.5,0) 5(4.4,0) 6(3.3,0) 7(2.2,0) 8(1.1,0) 9(0,0)
  rect 1.6x1.4 smd: 10(12.6,-0.85)
  rect 1.2x1.4 smd mask+0.102: 11(-1.1,-0.85)
  rect 1.2x2 smd: 12(-1.1,-10.45) 13(14.4,-10.45)
  silkscreen extent -0.3,-15.01 13.64,-0.89
"TFT LCD" [mil] "TFT LCD 320x240"
  rect 70x70 hole 43.31: 1(170,-509)
  round 70 hole 43.31: 2(70,-509) 3(170,-609) 4(70,-609) 5(170,-709) 6(70,-709) 7(170,-809) 8(70,-809) 9(170,-909) 10(70,-909) 11(170,-1009) 12(70,-1009) 13(170,-1109) 14(70,-1109) 15(170,-1209) 16(70,-1209) 17(170,-1309) 18(70,-1309) 19(170,-1409) 20(70,-1409) 21(170,-1509) 22(70,-1509) 23(170,-1609) 24(70,-1609) 25(170,-1709) 26(70,-1709) 27(170,-1809) 28(70,-1809) 29(170,-1909) 30(70,-1909) 31(170,-2009) 32(70,-2009)
  silkscreen extent 20,-2059 220,-459
TSOP80P1180X120-44N [mm] "TSOP, 44-Leads, Body 18.41x10.16mm, Pitch 0.80mm, IPC Medium Density"
  rect 1.2x0.55 smd: 1(-5.75,8.4) 2(-5.75,7.6) 3(-5.75,6.8) 4(-5.75,6) 5(-5.75,5.2) 6(-5.75,4.4) 7(-5.75,3.6) 8(-5.75,2.8) 9(-5.75,2) 10(-5.75,1.2) 11(-5.75,0.4) 12(-5.75,-0.4) 13(-5.75,-1.2) 14(-5.75,-2) 15(-5.75,-2.8) 16(-5.75,-3.6) 17(-5.75,-4.4) 18(-5.75,-5.2) 19(-5.75,-6) 20(-5.75,-6.8) 21(-5.75,-7.6) 22(-5.75,-8.4) 23(5.75,-8.4) 24(5.75,-7.6) 25(5.75,-6.8) 26(5.75,-6) 27(5.75,-5.2) 28(5.75,-4.4) 29(5.75,-3.6) 30(5.75,-2.8) 31(5.75,-2) 32(5.75,-1.2) 33(5.75,-0.4) 34(5.75,0.4) 35(5.75,1.2) 36(5.75,2) 37(5.75,2.8) 38(5.75,3.6) 39(5.75,4.4) 40(5.75,5.2) 41(5.75,6) 42(5.75,6.8) 43(5.75,7.6) 44(5.75,8.4)
  silkscreen extent -5.87,-9.25 4.75,9.35, body extent -5.15,-9.25 5.15,9.25, height 1.2
XO75 [mm] "晶体振荡器,7.0×5.0×1.70 mm"
  rect 1.8x2 smd: 1(0,0) 2(5.08,0) 3(5.08,4) 4(0,4)
  round 0.762 on Top Overlay: 5(-0.635,-1.905)
  silkscreen extent -1.27,-1.27 6.35,5.33

## Part data
BAT1: library part BAT
C1 C2 C3 C4 C5 C6 C7 C8 C9 C10 C11 C12 C13 C14 C15 C16 C17 C18 C19 C20 C21 C22 C23 C25 C26 C28 C29 C30 C31 C32 C33 C34 C35 C36 C37 C38 C39 C40 C41 C43 C44 C45 C47 C48 C49 C50 C51: library part CAP, "Capacitor"
C24: library part "CAPACITOR POL", "Capacitor"
C27 C46: library part EEE1EA100SR, "Aluminum Electrolytic Capacitor SMD  Footprint:SizeCode_C", Manufacturer=Panasonic, Manufacturer Part Number=EEE1EA100SR
CN1: "3pin, 5mm, DC input connect,"
D1: "Diode"
D2 D3: library part "Diode 1N914", "High Conductance Fast Diode", Code_JEDEC=DO-204-AH, ComponentLink1Description="Manufacturer Link", ComponentLink1URL=http://www.fairchildsemi.com/, ComponentLink2Description=Datasheet, ComponentLink2URL=http://www.fairchildsemi.com/ds/1N%2F1N4448.pdf, DatasheetVersion=1997, LatestRevisionDate=17-Jul-2002, LatestRevisionNote="Re-released for DXP Platform.", PackageDescription="Diode, Axial; Body 3.8 x 1.9 mm (LxDia. max), Lead Dia. 0.53 mm (max)", PackageReference=DO-35, Published=8-Jun-2000, Publisher="Altium Limited"
J1: "320x240,32PIN,"
J2: library part "RJ45,10/100 Base -TX,有变压器"
J3: "TF card socket,9pin,minisd socket,mirco sd socket,"
J4: "Header, 10-Pin, Dual row"
J5 J6: "MINI USB AB 5pin SMT"
K1 K2: "pitch 5mm,blue, 2 pin,length 10mm"
P1: "Header, 9-Pin, Dual row", LatestRevisionDate=17-Jul-2002, LatestRevisionNote="Re-released for DXP Platform.", Publisher="Altium Limited"
P2 P3: "Header, 3-Pin", LatestRevisionDate=17-Jul-2002, LatestRevisionNote="Re-released for DXP Platform.", Publisher="Altium Limited"
P4: "Header, 2-Pin", LatestRevisionDate=17-Jul-2002, LatestRevisionNote="Re-released for DXP Platform.", Publisher="Altium Limited"
Q1 Q2 Q3 Q4 Q6: library part IRLML6401, "HEXFET Power MOSFET", ComponentLink1Description="Manufacturer Link", ComponentLink1URL=http://www.irf.com/, ComponentLink2Description=Datasheet, ComponentLink2URL=http://www.irf.com/product-info/datasheets/data/IRLML6401.pdf, DatasheetVersion=2-Jul-2001, PackageDescription="3-Pin SOT-23 Package 0.95 mm Pitch, 2.3 mm Lead Span", PackageReference=Micro3, PackageVersion=Jul-2001, Published=17-Sep-2003, Publisher="Altium Limited"
Q5: "N-MOS SOT-23"
R1 R2 R3 R4 R5 R6 R7 R8 R9 R10 R11 R12 R13 R14 R15 R16 R17 R18 R19 R20 R21 R22 R23 R24 R25 R26 R27 R28 R29 R30 R31 R32 R33 R34 R35 R36 R37 R38 R39 R40 R41 R42 R43 R44 R45 R46 R47 R48 R49 R50 R51 R52 R53 R54 R55 R56 R57 R58 R59 R60 R61 R62 R63 R64 R65 R66 R67 R68 R69: "Resistor", LatestRevisionDate=29-May-2009, LatestRevisionNote="IPC-7351 Footprint Added.", PackageDescription="Chip Resistor", PackageReference=J1-0603, Published=8-Jun-2000, Publisher="Altium Limited"
SW1 SW2 SW3: library part SW-PB, "贴片按键"
T1 T2: library part HK4100F
U4: "64M Bits,SOIC-8,FLASH"
U7: "DC-DC  4.75-23V INPUT SOIC-8  3A"
Y1: library part Oscillator, "3.3V,Crystal Oscillator,25M,,Size 2.05×1.65×0.85 mm"
Y2 Y3 Y4: library part CRYSTAL, "无源晶振"
L1 L2 L3 L4: Code_IEC=1005, Code_JEITA=0402, LatestRevisionDate=29-May-2009, LatestRevisionNote="IPC-7351 Footprint Added.", PackageDescription="Chip Inductor", PackageReference=0402-A, Published=8-Jun-2000, Publisher="Altium Limited"

## Via types
v1: diameter 15.75, hole 11.81, Top Layer to Bottom Layer, 77 vias
v2: diameter 15.75, hole 15.75, Top Layer to Bottom Layer, 32 vias
v3: diameter 19.68, hole 7.87, Top Layer to Bottom Layer, 12 vias
v4: diameter 212.6, hole 137.8, Top Layer to Bottom Layer, 8 vias
v5: diameter 39.37, hole 23.62, Top Layer to Bottom Layer, 4 vias
v6: diameter 39.37, hole 19.68, Top Layer to Bottom Layer, 3 vias
v7: diameter 0/0 (per signal layer), hole 39.37, Top Layer to Bottom Layer, 2 vias
v8: diameter 39.37, hole 31.5, Top Layer to Bottom Layer, 2 vias
v9: diameter 39.37/39.37 (per signal layer), hole 51.18, Top Layer to Bottom Layer, 1 vias
v10: diameter 39.37/39.37 (per signal layer), hole 39.37, Top Layer to Bottom Layer, 1 vias
v11: diameter 39.37, hole 39.37, Top Layer to Bottom Layer, 1 vias
v12: diameter 39.37, hole 0.6, Top Layer to Bottom Layer, 1 vias

## Nets (pads, with @x,y where several pads share a name; then routed paths per layer and width w, separated by ;. In a path a pad name is that pad's centre, name@x,y a point inside that pad or via, vN(x,y) a via of type N, cw(c..) or ccw(c..) an arc to the next point about the centre after c; other vN are vias at no path point)
3.3V: C1.2 C2.1 C3.1 C4.1 C5.1 C10.1 C15.1 C22.2 C49.1 C50.1 D1.1 J1.1 J3.4 J4.1 J4.2 L1.2 L2.2 L3.2 L4.2 P1.2 R1.2 R2.2 R3.2 R4.2 R5.2 R6.1 R7.1 R9.2 R11.2 R12.2 R13.2 R14.2 R15.2 R16.2 R18.1 R19.1 R20.1 R21.1 R22.1 R24.2 R27.2 R28.2 R31.2 R33.1 R34.1 R35.2 R38.2 R41.2 R42.2 R43.2 R44.2 R55.2 R60.2 R62.1 R66.1 R67.1 R68.1 U2.11 U2.33 U4.3 U4.7 U4.8 Y1.4 | length 4074.9
  Top Layer w20: J4.1@270,-1490 J4.2@370,-1490 449,-1411 544,-1411 544,-1498 R44.2@539,-1503 R43.2@539,-1598.2 R42.2@539,-1693.4 622,-1776.4 622,-1949 592,-1979 R41.2@539,-1979 ; C49.1@999,-834 999,-799 1017,-781 R62.1@1017,-642 ; R1.2@2174,-2580 2244,-2580 R2.2@2247,-2583 2321,-2583 R3.2@2322,-2584 2394,-2584 C3.1@2397,-2581 ; R13.2@2397,-3576 R16.2@2524.33,-3576 R14.2@2651.67,-3576 R15.2@2779,-3576 ; U4.3@3454,-2678 3461,-2671 C15.1@3461,-2592 ; U4.7@3504,-2892.57 U4.8@3554,-2892.57 ; R24.2@3982,-1888 3984,-1890 4022,-1890 4022,-1980 Y1.4@4018,-1984
  Top Layer w39.37: v5(1849,-1539) 1849,-1247
  Top Layer w50: C49.1@999,-834 997,-836 C50.1@997,-932 997,-1000 987.48,-1009.52 L4.2@987.48,-1067 1161.79,-1067 D1.1@1188.39,-1093.6
  Top Layer w59.06: C49.1@999,-834 1316,-834 1729,-1247 1849,-1247
  Bottom Layer w10: C5.1@1557,-3766 C5.1@1569,-3754
  Bottom Layer w20: C5.1@1569,-3754 J1.1@1661,-3754 ; C1.2@1841.3,-1466 C1.2@1849,-1473.7
  Bottom Layer w39.37: C1.2@1841.3,-1466 1907.47,-1466 L2.2@1908.47,-1465 ; v5(1849,-1539) C1.2@1849,-1473.7
5V: C46.1 C47.1 Q3.2 Q4.3 Q6.3 R39.1 R40.1 R46.1 R47.1 R51.1 R52.2 R59.2 U7.2 | length 7031.2
  Top Layer w20: R51.1@535,-2390 v1(579,-2390) ; 664,-1207 664,-1740 700,-1776 700,-2119 v1(701,-2118) ; R59.2@707.4,-571 v6(707.4,-507.4)
  Top Layer w40: v11(267,-817) 218.12,-817 C46.1@153,-751.88 153,-924 436,-1207 664,-1207 676.7,-1194.3 C47.1@676.7,-1063 676.7,-962.3 U7.2@680,-959
  Bottom Layer w20: v1(579,-2390) 653,-2316 ; 654,-2315 653,-2316 ; v1(701,-2118) 653,-2166 653,-2316 ; v6@706,-506 v6(707.4,-507.4) ; R47.1@801,-3502 801,-3390 779,-3368 779,-3067 657,-2945 657,-2834 699,-2792 801,-2792 ; R46.1@801,-2856 801,-2792 ; 653,-2316 653,-2465 801,-2613 801,-2792
  Bottom Layer w40: v11(267,-817) 297,-787 483.05,-787 Q6.3@512.4,-757.65 565.35,-757.65 637,-686 705,-686 704,-685 704,-511 826,-389 987,-389 1180,-582 2265,-582 2385,-462 2385,-321 2386,-320 R52.2@2466,-320 2469.4,-316.6 Q3.2@2550.35,-316.6 ; R47.1@801,-3502 R40.1@874,-3502 ; R46.1@801,-2856 R39.1@874,-2856
5V_EN: Q5.1 Q6.1 R59.1 R61.2 R65.1 U7.7 | length 508.6
  Top Layer w20: Q5.1@451,-595.8 v2@485,-629.8 ; v2(480.2,-629.8) v2@485,-629.8 ; R65.1@485,-852 v2@485,-629.8 ; U7.7@680,-744.43 680,-697 707.4,-669.6 R59.1@707.4,-641
  Top Layer w40: R61.2@412,-853 484,-853 R65.1@485,-852
  Bottom Layer w20: Q6.1@475,-673 475,-635 v2(480.2,-629.8)
A0: U1.10 U2.5 | length 2106.4
  Top Layer w5: v1(1775,-2572) 1806,-2603 1875,-2603 1982,-2710 1982,-3318 2028,-3364 2131,-3364 2208.5,-3286.5 U2.5@2208.5,-3262.76 ; v2(1779,-1827) 1804.82,-1801.18 U1.10@1919.29,-1801.18
  Bottom Layer w5: v1(1775,-2572) 1775,-2416.8 1777.5,-2414.3 1735.02,-2371.82 1744,-2362.83 1744,-1862 v2(1779,-1827)
A1: U1.11 U2.4 | length 1996.3
  Top Layer w5: v2(1781,-1859) 1819.13,-1820.87 U1.11@1919.29,-1820.87 ; v1(1806,-2552) 1806,-2561 1838,-2593 1879.14,-2593 1992,-2705.86 1992,-3313.43 2032.57,-3354 2102,-3354 2177.01,-3278.99 U2.4@2177.01,-3262.76
  Bottom Layer w5: v2(1781,-1859) 1754,-1886 1754,-2376.66 1799.77,-2422.43 1794,-2428.2 1794,-2540 v1(1806,-2552)
A2: U1.12 U2.3 | length 1892.7
  Top Layer w5: v2(1782,-1888) 1826.95,-1843.05 1916.79,-1843.05 U1.12@1919.29,-1840.55 ; v1(1825,-2535) 1858,-2568 1868.28,-2568 2002,-2701.72 2002,-3309.28 2035.68,-3342.96 2085.32,-3342.96 2145.51,-3282.77 U2.3@2145.51,-3262.76
  Bottom Layer w5: v2(1782,-1888) 1764,-1906 1764,-2372.52 1825,-2433.52 v1(1825,-2535)
A3: U1.13 U2.2 | length 1812.5
  Top Layer w5: v2(1785,-1915) 1837.26,-1862.74 1916.79,-1862.74 U1.13@1919.29,-1860.24 ; v1(1844,-2497) 1844.31,-2497.31 1844.31,-2529.89 2012,-2697.57 2012,-3305.14 2039.82,-3332.96 2081.18,-3332.96 2114.02,-3300.13 U2.2@2114.02,-3262.76
  Bottom Layer w5: v2(1785,-1915) 1777,-1923 1777,-2371.37 1844.31,-2438.69 1844,-2439 v1(1844,-2497)
A4: U1.14 U2.1 | length 1747.6
  Top Layer w5: v2(1818,-1920) 1855.58,-1882.42 1916.79,-1882.42 U1.14@1919.29,-1879.92 ; v1(1866.58,-2483.42) 1866.58,-2538.02 2022,-2693.43 2022,-3301 2043.96,-3322.96 2077.04,-3322.96 2082.52,-3317.48 U2.1@2082.52,-3262.76
  Bottom Layer w5: v2(1818,-1920) 1823.75,-1920 1819.88,-1916.12 1792,-1944 1792,-2372.23 1836.18,-2416.42 1836.42,-2416.42 1866.58,-2446.58 v1(1866.58,-2483.42)
A5: U1.15 U2.44 | length 1102.6
  Top Layer w5: v2(1821,-1945) 1866.39,-1899.61 U1.15@1919.29,-1899.61 ; v1(1889,-2466) 1889,-2546.29 2032,-2689.29 2032,-2755 2082.52,-2805.52 U2.44@2082.52,-2810
  Bottom Layer w5: v2(1821,-1945) 1806.51,-1959.49 1806.51,-2372.6 1840.33,-2406.42 1840.56,-2406.42 1889,-2454.86 v1(1889,-2466)
A6: U1.50 U2.43 | length 524.9
  Top Layer w5: U2.43@2114.02,-2810 2114.02,-2764 2123.5,-2754.52 2123.5,-2551.5 2148,-2527 2250.86,-2527 2273.62,-2504.24 U1.50@2273.62,-2411.42
A7: U1.53 U2.42 | length 546.3
  Top Layer w5: U2.42@2145.51,-2810 2145.51,-2764 2133.5,-2751.98 2133.5,-2555.65 2152.14,-2537 2255,-2537 2330.18,-2461.82 2330.18,-2413.92 U1.53@2332.68,-2411.42
A8: U1.54 U2.27 | length 584.8
  Top Layer w5: U1.54@2352.36,-2411.42 2352.36,-2527.36 2373,-2548 2503.01,-2548 2617.95,-2662.95 U2.27@2617.95,-2810
A9: U1.55 U2.26 | length 583.3
  Top Layer w5: U1.55@2372.05,-2411.42 2372.05,-2522.05 2388,-2538 2507.15,-2538 2649.45,-2680.3 U2.26@2649.45,-2810
A10: U1.56 U2.25 | length 584.4
  Top Layer w5: U1.56@2391.73,-2411.42 2391.73,-2449.35 2390.73,-2450.35 2390.73,-2518.73 2400,-2528 2511.29,-2528 2680.94,-2697.65 U2.25@2680.94,-2810
A11: U1.57 U2.24 | length 580.9
  Top Layer w5: U1.57@2411.42,-2411.42 2411.42,-2512.42 2417,-2518 2515.43,-2518 2712.44,-2715.01 U2.24@2712.44,-2810
A12: U1.87 U2.22 | length 1746.6
  Top Layer w5: U2.22@2743.94,-3262.76 2746.44,-3265.26 2746.44,-3288.44 2796,-3338 2952.86,-3338 3018.37,-3272.48 3018.37,-2119.52 2936.26,-2037.4 U1.87@2805.12,-2037.4
A13: U1.88 U2.21 | length 1829.5
  Top Layer w5: U2.21@2712.44,-3262.76 2714.94,-3265.26 2714.94,-3301.48 2764.46,-3351 2954,-3351 3028.37,-3276.63 3028.37,-2115.37 2930.72,-2017.72 U1.88@2805.12,-2017.72
A14: U1.89 U2.20 | length 1919.4
  Top Layer w5: U2.20@2680.94,-3262.76 2683.44,-3265.26 2683.44,-3314.53 2733.91,-3365 2956,-3365 3038.37,-3282.63 3038.37,-2102.52 2933.89,-1998.03 U1.89@2805.12,-1998.03
A15: U1.90 U2.19 | length 2004
  Top Layer w5: U2.19@2649.45,-3262.76 2651.95,-3265.26 2651.95,-3327.58 2702.37,-3378 2960,-3378 3048.37,-3289.63 3048.37,-2098.37 2928.35,-1978.35 U1.90@2805.12,-1978.35
A16: U1.80 U2.18 | length 1503.3
  Top Layer w5: U2.18@2617.95,-3262.76 2617.95,-3214.05 2624,-3208 v2(2889,-3208) ; v2(2720,-2204) 2748.8,-2175.2 U1.80@2805.12,-2175.2
  Bottom Layer w5: v2(2720,-2204) 2714,-2210 2714,-2312.72 2848,-2446.72 2848,-2562.11 2895,-2609.11 2895,-3202 v2(2889,-3208)
A17: U1.81 U2.23 | length 1032.3
  Top Layer w5: U2.23@2743.94,-2810 v2(2743.94,-2755.06) ; U1.81@2805.12,-2155.51 2805.43,-2155.2 v2(2887.2,-2155.2)
  Bottom Layer w5: v2(2743.94,-2755.06) 2743.94,-2737.06 2839.5,-2641.5 2844.11,-2641.5 2848.5,-2637.11 2848.5,-2590.89 2828,-2570.39 2828,-2455 2689,-2316 2689,-2187 2711,-2165 2881,-2165 2889,-2157 v2(2887.2,-2155.2)
A18: U1.82 U2.28 | length 1344.9
  Top Layer w5: U2.28@2586.46,-2810 2586.46,-2845.46 2594,-2853 2766,-2853 2781,-2838 v2(2781,-2770) ; U1.82@2805.12,-2135.83 2902.83,-2135.83 2915,-2148 2915,-2168 v2(2909,-2174)
  Bottom Layer w5: v2(2781,-2770) 2781,-2730 2858.5,-2652.5 2858.5,-2586.75 2838,-2566.25 2838,-2450.86 2699,-2311.86 2699,-2191.14 2715.14,-2175 2889.14,-2175 2890.14,-2174 v2(2909,-2174)
AGND: C41.2 C43.2 C44.2 R69.2 U1.31
AVDD: C6.1 C7.1 C8.1 J2.4 J2.5 U3.1 U3.2 U3.9 | length 1329.8
  Top Layer w10: U3.9@4061.79,-1013.65 4061.79,-1046.79 4078,-1063 4197,-1063 4219.27,-1040.73 U3.1@4219.27,-1013.65
  Top Layer w19.68: C8.1@4356,-938 C8.1@4357,-937 ; C7.1@4357,-863 C7.1@4358,-862
  Top Layer w23.62: J2.4@4155.37,-749.91 4105.37,-699.91 J2.5@4105.37,-649.91 4105.37,-609.63 4148,-567 4316,-567 4385,-636 4385,-694 4358,-721 C7.1@4358,-862 ; 4209.43,-1033 4209.43,-974 4264,-974 4302,-1012 C6.1@4356,-1012 C8.1@4356,-938 ; C8.1@4357,-937 C7.1@4357,-863
BL_EN: J1.24 R17.2 U1.20 | length 3139.3
  Top Layer w5: v1(1843,-1998.56) 1843.53,-1998.03 U1.20@1919.29,-1998.03 ; v1(2147.1,-3623) 2284.1,-3486 2908,-3486 2960,-3538 2960,-3623 2937,-3646 R17.2@2906.33,-3646 2816,-3736.33 2816,-3799 J1.24@2761,-3854
  Bottom Layer w5: v1(1843,-1998.56) 1843.99,-1998.56 1868,-2022.57 1868,-2388 1960,-2480 1960,-2554.32 2147.1,-2741.41 v1(2147.1,-3623) v1@2144.1,-3626
BOOT0: P3.2 U1.138 | length 2017.9
  Top Layer w5: v1(1760,-1558) 1784,-1582 1857,-1582 1902,-1537 1902,-1450 1923,-1429 2121,-1429 2135.83,-1443.83 U1.138@2135.83,-1525.59
  Bottom Layer w5: P3.2@893,-2282 893,-1833 1168,-1558 v1(1760,-1558)
BOOT1: P2.2 U1.48
D0: J1.3 U1.85 U2.7 | length 2730.7
  Top Layer w5: J1.3@1761,-3754 1761,-3741.86 1836.86,-3666 1894.37,-3666 2271.5,-3288.88 U2.7@2271.5,-3262.76 2271.5,-3214.96 2320.27,-3166.19 2914.81,-3166.19 2998.37,-3082.63 2998.37,-2135.37 2939.77,-2076.77 U1.85@2805.12,-2076.77
D1: J1.4 U1.86 U2.8 | length 2868.9
  Top Layer w5: J1.4@1761,-3854 1761,-3838 1813,-3786 1813,-3704 1841,-3676 1898.52,-3676 2244.65,-3329.87 2262,-3329.87 2302.99,-3288.88 U2.8@2302.99,-3262.76 2302.99,-3197.61 2324.41,-3176.19 2922.81,-3176.19 3008.37,-3090.63 3008.37,-2129.37 2936.09,-2057.09 U1.86@2805.12,-2057.09
D2: J1.5 U1.114 U2.9 | length 2908.6
  Top Layer w5: J1.5@1861,-3754 2250,-3365 2292.49,-3365 v2(2334.49,-3323) U2.9@2334.49,-3262.76 ; v1(2426,-1868.01) 2429.74,-1864.27 2491.5,-1864.27 2608.27,-1747.5 U1.114@2608.27,-1525.59
  Bottom Layer w5: v2(2334.49,-3323) 2352.49,-3341 2404.14,-3341 2412,-3333.14 2412,-3228 2633,-3007 2633,-2734.86 2412,-2513.86 2412,-1882.01 v1(2426,-1868.01)
D3: J1.6 U1.115 U2.10 | length 2965.5
  Top Layer w5: J1.6@1861,-3854 1861,-3825.5 1909,-3777.5 1909,-3720.14 2254.14,-3375 2313.98,-3375 v2(2365.98,-3323) U2.10@2365.98,-3262.76 ; v1(2426,-1847.26) 2429.74,-1851 2486,-1851 2595,-1742 2595,-1569.94 2588.58,-1563.53 U1.115@2588.58,-1525.59
  Bottom Layer w5: v2(2365.98,-3323) 2381.98,-3323 2400,-3304.98 2400,-3223 2623,-3000 2623,-2739 2400,-2516 2400,-1872.27 2425.01,-1847.26 v1(2426,-1847.26)
D4: J1.7 U1.58 U2.13 | length 1819.1
  Top Layer w5: J1.7@1961,-3754 1961,-3688 2259,-3390 2385.29,-3390 2460.47,-3314.82 U2.13@2460.47,-3262.76 v2(2460.47,-3209) ; U1.58@2431.1,-2411.42 2431.1,-2449.35 2432,-2448.45 v2(2432,-2486)
  Bottom Layer w5: v2(2432,-2486) 2432,-2508 2643,-2719 2643,-3078.53 2547.91,-3173.63 2505.6,-3173.63 2470.23,-3209 v2(2460.47,-3209)
D5: J1.8 U1.59 U2.14 | length 1902.7
  Top Layer w5: J1.8@1961,-3854 1961,-3840 2011,-3790 2011,-3660 2269,-3402 2387.43,-3402 2491.97,-3297.46 U2.14@2491.97,-3262.76 v2(2491.97,-3209) ; U1.59@2450.79,-2411.42 2450.79,-2482.93 2461,-2493.14 v2(2461,-2497)
  Bottom Layer w5: v2(2461,-2497) 2461,-2510.5 2653,-2702.5 2653,-3082.68 2552.05,-3183.63 2523.46,-3183.63 2498.09,-3209 v2(2491.97,-3209)
D6: J1.9 U1.60 U2.15 | length 1789
  Top Layer w5: J1.9@2061,-3754 2026,-3719 2026,-3659.14 2273.14,-3412 2391.57,-3412 2501.97,-3301.61 2501.97,-3297 2517,-3297 2523.46,-3290.54 U2.15@2523.46,-3262.76 v2(2523.46,-3209) ; U1.60@2470.47,-2411.42 2470.47,-2476.47 v2(2492,-2498)
  Bottom Layer w5: v2(2492,-2498) 2492,-2510.99 2663,-2681.99 2663,-3086.82 2556.19,-3193.63 2548.59,-3193.63 2533.22,-3209 v2(2523.46,-3209)